# Altium PCB PCB.PcbDoc
Units mil, origin at the board's own origin, x right, y up, seen from the top; angles counter-clockwise.
Board outline 1655 x 1720 mil, 2 copper layers (Top Layer, Bottom Layer); 11 components, 17 nets, 60 pads, 6 vias.
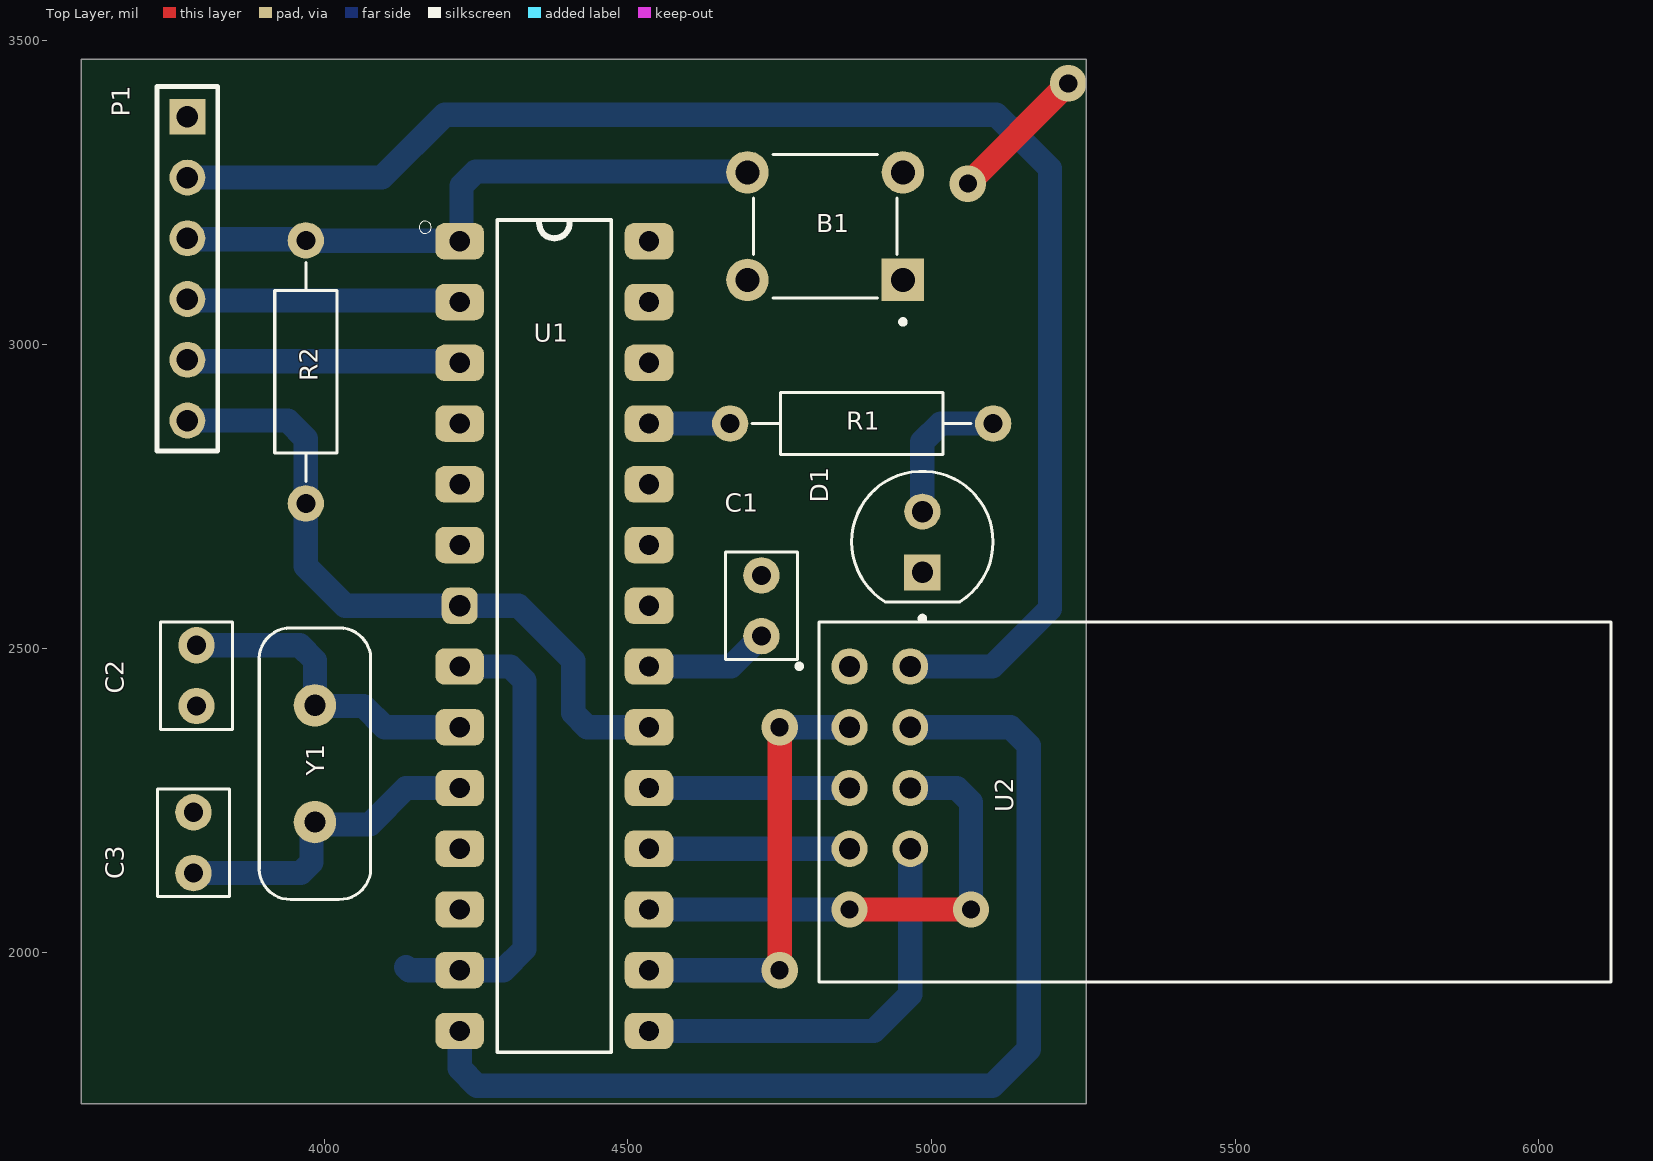
[diagram p0: Top Layer view]
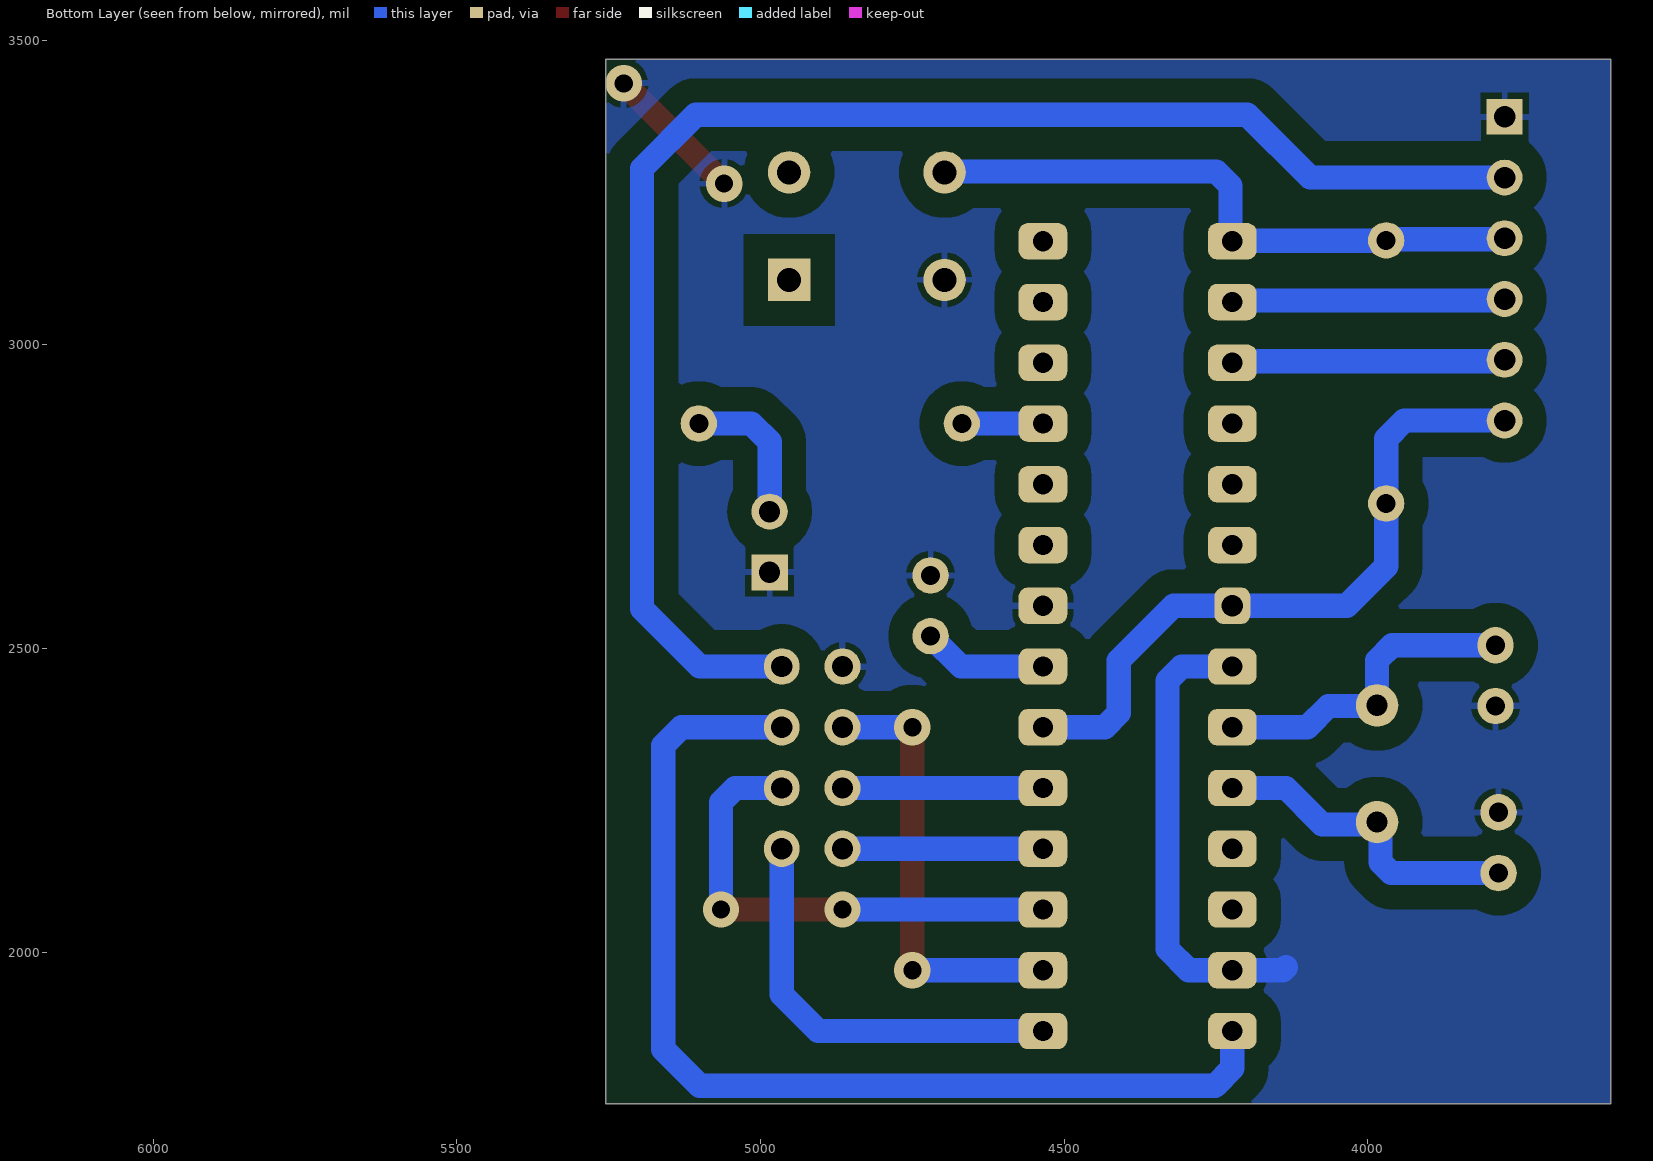
[diagram p1: Bottom Layer view, seen from below]
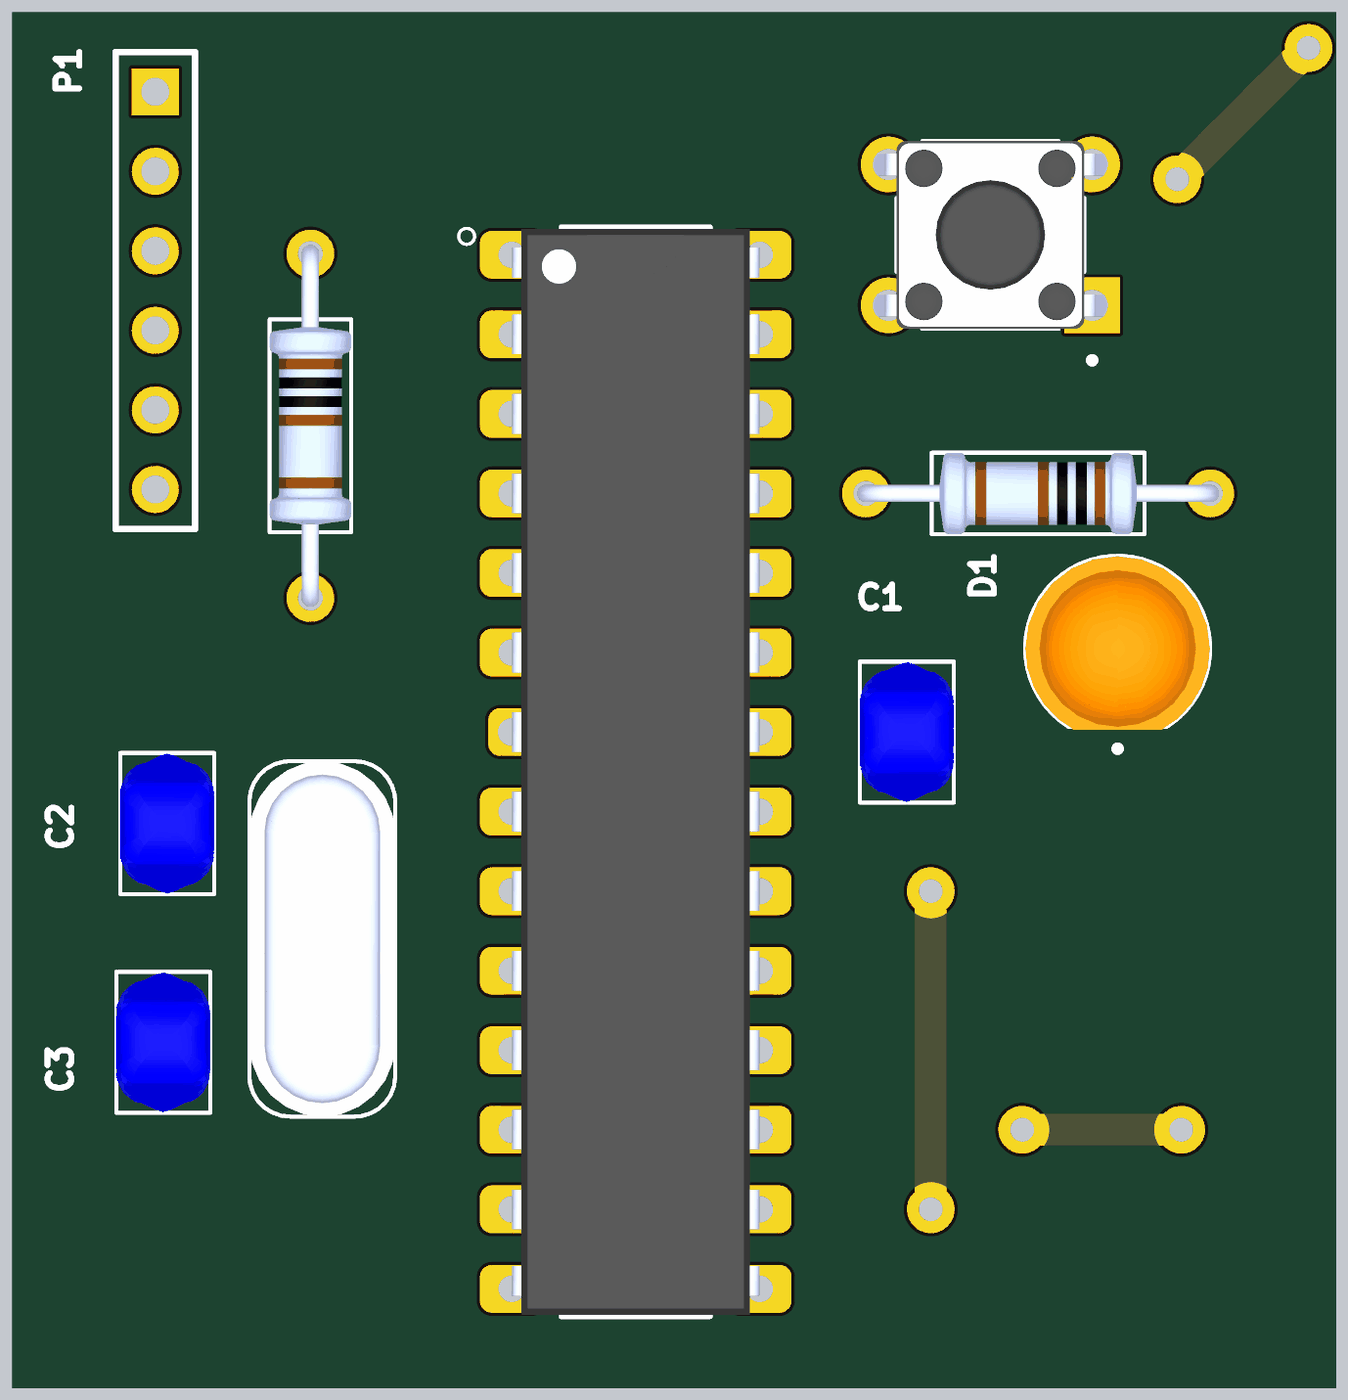
[diagram p2: 3D render of the assembled board from above, using the file's embedded part models]

## Layer stack, top to bottom
Top Solder: solder mask 0.4, Solder Resist, Dk 3.5
Top Layer: signal copper 1.4
Dielectric 1: dielectric 12.6, FR-4, Dk 4.8
Bottom Layer: signal copper 1.4
Bottom Solder: solder mask 0.4, Solder Resist, Dk 3.5

## Board outline
3600,1750 5255,1750 5255,3470 3600,3470

## Design rules (kind name [scope] priority, off if disabled: settings)
Clearance [All] p1: gap=40 ignorepadtopadclearanceinfootprint=FALSE
PolygonConnect [All] p1: connectstyle=Relief reliefconductorwidth=10 reliefentries=4 polygonreliefangle="90 Angle" airgapwidth=10
RoutingVias [All] p1: holewidth=35 width=70 viastyle="Through Hole" minholewidth=30 minwidth=60 maxholewidth=40 maxwidth=90
SolderMaskExpansion [All] p1: expansion=4 istentingtop=FALSE
Width [All] p1: maxlimit=50 minlimit=40 preferedwidth=40
30 further rules are at their usual default settings.

## Components (designator, comment, footprint, x,y, rotation, side; value= is the part's Value field where it differs from the comment)
B1 "Push button" SW_TS02-66-95-BK-260-LCR-D 4825,3195 r180 top
C1 "100nF" CAPRB500W50L450T300H550 4720,2620 r270 top
C2 "22pF" CAPRB500W50L450T300H550 3790,2405 r90 top
C3 "22pF" CAPRB500W50L450T300H550 3785,2230 r270 top
D1 "L08R5000Q1" LEDRD254W57D500H1070 4985,2675 r90 top
P1 "Header 6" HDR1X6 3775,3375 r270 top
R1 "220" RESAD1100W55L680D260 4885,2870 r0 top
R2 "10k" RESAD1100W55L680D260 3970,2955 r90 top
U1 "ATMEGA328P-PU" DIP794W46P254L2967H457Q28B 4379.09,2520 r0 top
U2 "NRF24L01P-MODULE-PCB" XCVR_NRF24L01P-MODULE-PCB 5466.75,2246.82 r0 top
Y1 "ECS-160-S-4" XTAL_ECS-160-20-4X 3985,2310 r270 top

## Footprints (in the part's own frame and the unit in brackets; to place one, negate y for a bottom-side part, rotate by r counter-clockwise, add the part's x,y. Pads: shape width x height; smd on the part's side, far side on the other; paste and mask are expansions set on the pad)
CAPRB500W50L450T300H550 [mil]
  round 60 hole 31.5: 1(0,0) 2(100,0)
  silkscreen extent -39,-59 139,59, body extent -38,-59 138,59, height 210
DIP794W46P254L2967H457Q28B [mil]
  rrect50% 80x60 hole 33.46: 1(-155.91,650) 2(-155.91,550) 3(-155.91,450) 4(-155.91,350) 5(-155.91,250) 6(-155.91,150) 8(-155.91,-50) 9(-155.91,-150) 10(-155.91,-250) 11(-155.91,-350) 12(-155.91,-450) 13(-155.91,-550) 14(-155.91,-650) 15(155.91,-650) 16(155.91,-550) 17(155.91,-450) 18(155.91,-350) 19(155.91,-250) 20(155.91,-150) 21(155.91,-50) 22(155.91,50) 23(155.91,150) 24(155.91,250) 25(155.91,350) 26(155.91,450) 27(155.91,550) 28(155.91,650)
  rrect50% 59x60 hole 35: 7(-155.91,50)
  silkscreen extent -223,-685 94,685, body extent -156,-682 156,683, height 180
HDR1X6 [mm] "Connector; Header; 6 Position"
  rect 1.5x1.5 hole 0.9: 1(0,0)
  round 1.5 hole 0.9: 2(2.54,0) 3(5.08,0) 4(7.62,0) 5(10.16,0) 6(12.7,0)
  silkscreen extent -1.27,-1.27 13.97,1.27
LEDRD254W57D500H1070 [mil]
  oval 59x60 hole 35: A(50,0)
  rect 59x60 hole 35: C(-50,0)
  silkscreen extent -130,-116 116,116, body extent -102,-116 116,116, height 358
RESAD1100W55L680D260 [mil]
  round 60 hole 31.5: 1(-216.54,0) 2(216.54,0)
  silkscreen extent -180,-51 180,51, body extent -227,-51 227,51, height 101
SW_TS02-66-95-BK-260-LCR-D [mm]
  rect 1.778x1.778 hole 1: 1(-3.25,2.25)
  round 1.778 hole 1: 2(3.25,2.25) 3(-3.25,-2.25) 4(3.25,-2.25)
  silkscreen extent -3.35,-3 3,4.1, body extent -3.95,-3 3.94,3, height 9.7
XCVR_NRF24L01P-MODULE-PCB [mil]
  oval 59x60 hole 35: 1(-601.75,223.18) 2(-501.75,223.18) 3(-601.75,123.18) 4(-501.75,123.18) 5(-601.75,23.18) 6(-501.75,23.18) 7(-601.75,-76.82) 8(-501.75,-76.82)
  silkscreen extent -688,-296 652,296
XTAL_ECS-160-20-4X [mil]
  round 70 hole 35: 1(-96.06,0) 2(96.06,0)
  silkscreen extent -223,-92 223,92, body extent -223,-92 223,92, height 138

## Part data
C1 C2 C3: library part "Ceramic capacitor", "2200 pF Â±10% 250V Ceramic Capacitor X7R Radial", Package="Radial TDK", Check_prices=https://www.snapeda.com/parts/FG24X7R2E222KNT06/TDK/view-part/?ref=eda, Digi-Key_Part_Number=445-173386-1-ND, MF=TDK, MP=FG24X7R2E222KNT06, Purchase-URL=https://pricing.snapeda.com/search/part/FG24X7R2E222KNT06/?ref=eda, SnapEDA_Link=https://www.snapeda.com/parts/FG24X7R2E222KNT06/TDK/view-part/?ref=snap
D1: library part LED, "LED, Orange, Through Hole, T-1 3/4 (5mm), 30 mA, 2.1 V, 635 nm", Package=None, Availability=Unavailable, MF="{'manufacturer': u'LED Technology'}", MP=L08R5000Q1, Price=None
P1: "Header, 6-Pin", LatestRevisionDate=17-Jul-2002, LatestRevisionNote="Re-released for DXP Platform.", Publisher="Altium Limited"
R1 R2: library part "Resistor (0.25W)", "(MFR-25FBF52-10K) 10,2 kOhm bei 1% 0,25W, 1/4W Durchbohrlochwiderstand Axial Metal Film", Package="Axial Yageo", Digi-Key_Part_Number=10.2KXBK-ND, MF=Yageo, MP=MFR-25FBF52-10K, Purchase-URL=https://pricing.snapeda.com/search/part/MFR-25FBF52-10K/?ref=eda, SnapEDA_Link=https://www.snapeda.com/parts/MFR-25FBF52-10K/Yageo/view-part/424333/?ref=snap
U1: "ATmega Series 20 MHz 32 KB Flash 2 KB SRAM 8-Bit Microcontroller - DIP-28", Package=None, Availability=Unavailable, MP=ATMEGA328P-PU, Price=None
U2: "- Transceiver For Use With nRF24L01+", Package=None, Availability=Bad, MF="Nordic Semiconductor", Mouser-Purchase-URL=https://snapeda.com/shop?store=Mouser&id=230534, MP=NRF24L01P-MODULE-PCB, Price=None, SnapEDA_Link=https://www.snapeda.com/parts/NRF24L01P-MODULE-PCB/Nordic%20Semiconductor%20ASA/view-part/230534/?ref=snap
Y1: library part "Crystal oscilator", "CRYSTAL T/H", Package=None, Availability=Unavailable, MF="{'manufacturer': u'ECS Inc.'}", MP=ECS-160-S-4, Price=None

## Via types
v1: diameter 60, hole 30, Top Layer to Bottom Layer, 6 vias

## Nets (pads, with @x,y where several pads share a name; then routed paths per layer and width w, separated by ;. In a path a pad name is that pad's centre, name@x,y a point inside that pad or via, vN(x,y) a via of type N, cw(c..) or ccw(c..) an arc to the next point about the centre after c; other vN are vias at no path point)
+3V3: P1.2 U2.2 | length 2493.9
  Bottom Layer w40: P1.2 4095,3275 4198.58,3378.58 5106.42,3378.58 5195,3290 5195,2565 5100,2470 U2.2
+5: P1.6 R2.1 U1.7 U1.20 | length 1142.9
  Bottom Layer w40: P1.6 3940,2875 3970,2845 R2.1 3970,2635 4035,2570 U1.7 4320,2570 4410,2480 4410,2393.43 4433.43,2370 U1.20
CSN: U1.14 U2.4 | length 1742.4
  Bottom Layer w40: U1.14 4223.19,1808.43 4251.62,1780 5100,1780 5160,1840 5160,2340 5130,2370 U2.4
GND: B1.2 C1.1 C2.1 C3.1 D1.C P1.1 U1.8 U1.13 U1.22 U2.1 | length 1003
  Top Layer w40: v1(5060,3265) v1(5225,3430)
  Bottom Layer w40: 4135,1975 4140,1970 U1.13 4295,1970 4330,2005 4330,2446.57 4306.57,2470 U1.8
IRQ: U1.15 U2.8 | length 694.9
  Bottom Layer w40: U1.15 4905,1870 4965,1930 U2.8
NetC1_2: C1.2 U1.21 | length 205.7
  Bottom Layer w40: U1.21 4670,2470 C1.2
NetD1_A: D1.A R1.2 | length 244
  Bottom Layer w40: D1.A 4985,2840 5015,2870 R1.2
NetP1_4: P1.4 U1.2 | length 450.3
  Bottom Layer w40: P1.4 3777.5,3072.5 4220.69,3072.5 U1.2
NetP1_5: P1.5 U1.3 | length 450.3
  Bottom Layer w40: P1.5 3777.5,2972.5 4220.69,2972.5 U1.3
NetR1_1: R1.1 U1.25 | length 133.5
  Bottom Layer w40: U1.25 R1.1
NetU1_16: U1.16 U2.3 | length 730
  Top Layer w40: v1(4750,1970) v1(4750,2370)
  Bottom Layer w40: U1.16 v1(4750,1970) ; v1(4750,2370) U2.3
NetU1_17: U1.17 U2.6 | length 816.3
  Top Layer w40: v1(4865,2070) v1(5065,2070)
  Bottom Layer w40: U1.17 v1(4865,2070) ; U2.6 5041.57,2270 5065,2246.57 v1(5065,2070)
NetU1_18: U1.18 U2.7 | length 330
  Bottom Layer w40: U1.18 U2.7
NetU1_19: U1.19 U2.5 | length 330
  Bottom Layer w40: U1.19 U2.5
reset: B1.4 P1.3 R2.2 U1.1 | length 1022.4
  Bottom Layer w40: P1.3 3776.73,3173.27 3968.27,3173.27 R2.2 3970.77,3170.77 4222.42,3170.77 U1.1 ; U1.1@4226.15,3170 4226.15,3261.57 4249.58,3285 B1.4@4697.05,3285
XTAL1: C2.2 U1.9 Y1.1 | length 532.4
  Bottom Layer w40: C2.2 3960,2505 3985,2480 Y1.1 3986.06,2405 4065,2405 4100,2370 U1.9
XTAL2: C3.2 U1.10 Y1.2 | length 534.9
  Bottom Layer w40: C3.2 3961.57,2130 3979.26,2147.69 3979.26,2208.2 Y1.2 3988.94,2210 4075,2210 4135,2270 U1.10
pads on no net: B1.1 B1.3 U1.4 U1.5 U1.6 U1.11 U1.12 U1.23 U1.24 U1.26 U1.27 U1.28

## Polygon pours and split planes (outlines as drawn)
GND on Bottom Layer "NONET_L02_P-001" (solid, remove dead copper, pour order 0): 3600,3470 3600,1750 5255,1750 5255,3470

## Silkscreen, mask and mechanical layers (free items; w line width, h text height)
Board:
  the board outline again, w10